# Altium PCB MCU1.PcbDoc
Units mm, origin at the board's own origin, x right, y up, seen from the top; angles counter-clockwise.
Board outline 58 x 31.5 mm, 2 copper layers (Top Layer, Bottom Layer); 38 components, 60 nets, 160 pads, 36 vias.
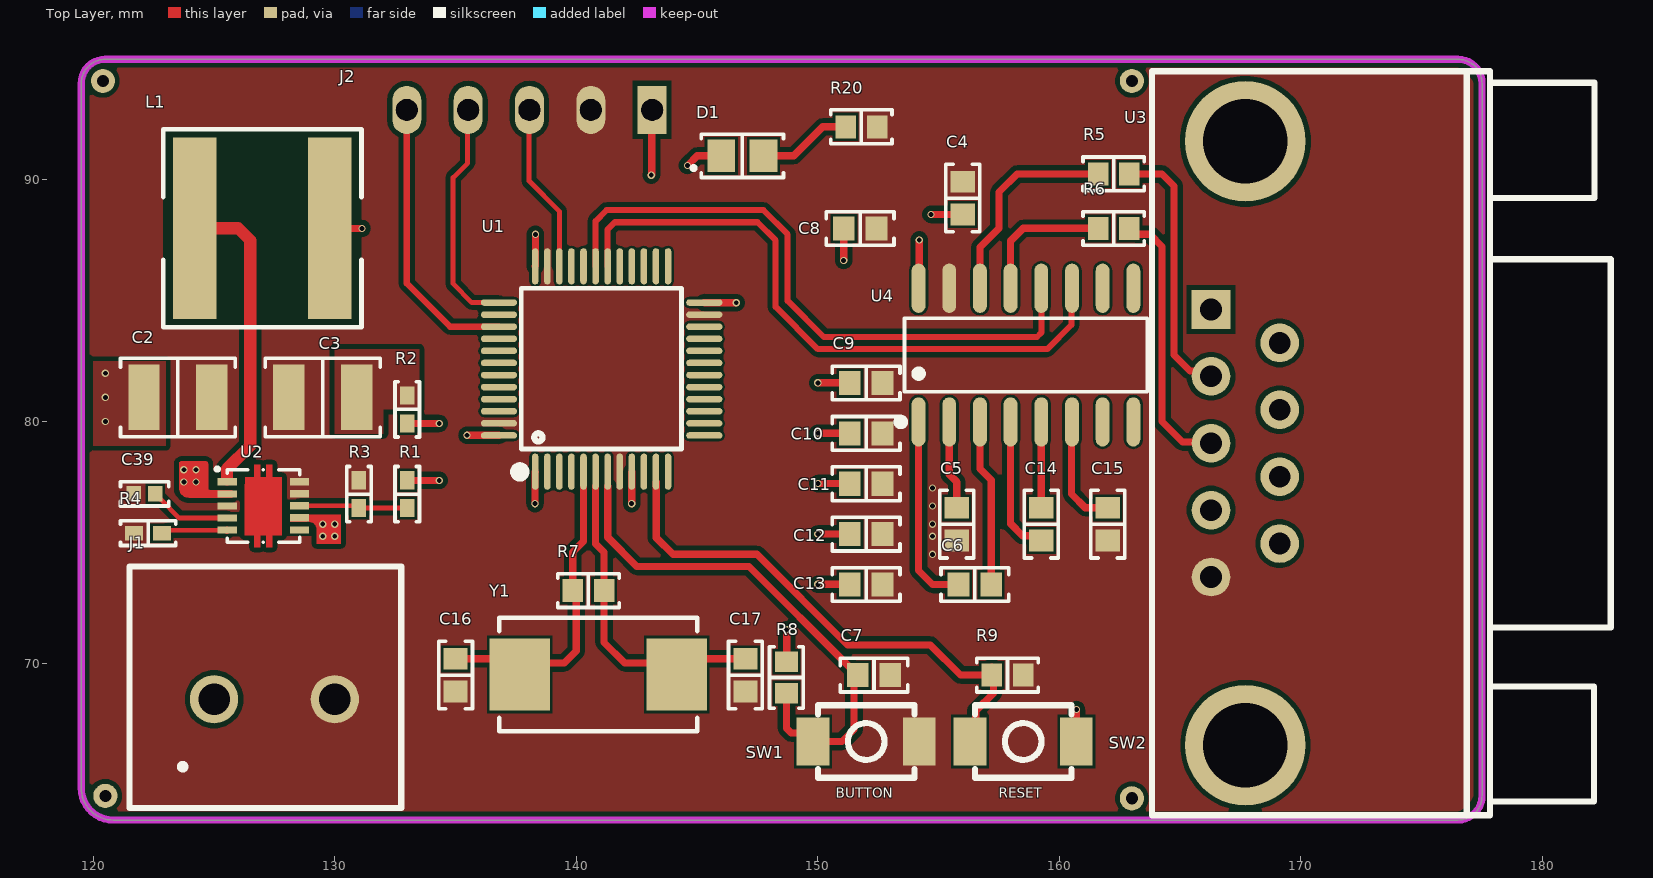
[diagram p0: Top Layer view]
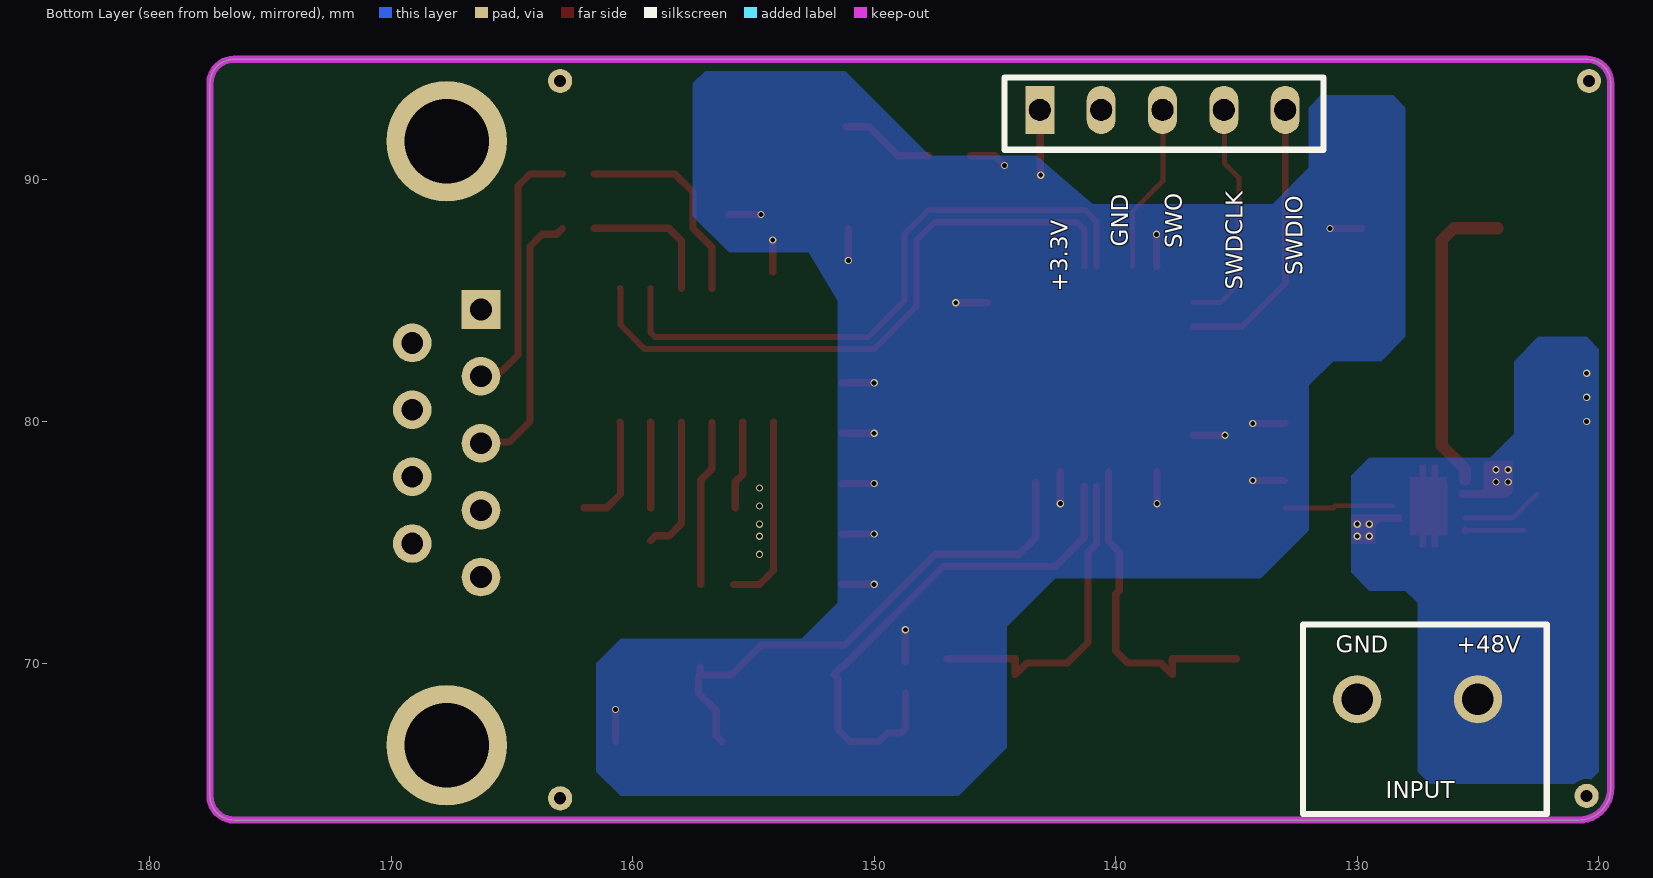
[diagram p1: Bottom Layer view, seen from below]

## Layer stack, top to bottom
Top Solder: solder mask 0.0102, Solder Resist, Dk 3.5
Top Layer: signal copper 0.0356
Dielectric 1: dielectric 0.32, FR-4, Dk 4.8
Bottom Layer: signal copper 0.0356
Bottom Solder: solder mask 0.0102, Solder Resist, Dk 3.5

## Board outline
119.5,64.821 119.5,65 119.5,94 cw(c120.5,94) 120.5,95 120.821,95 176.5,95 cw(c176.5,94) 177.5,94 177.5,93.5 177.5,64.5 cw(c176.5,64.5) 176.5,63.5 120.821,63.5 cw(c120.821,64.821)

## Design rules (kind name [scope] priority, off if disabled: settings)
Clearance [All] p1: gap=0.2 ignorepadtopadclearanceinfootprint=FALSE except(0.1: SMDPad-SMDPad SMDPad-Fill SMDPad-Poly SMDPad-Region)
HoleSize [All] p1: absolutevalues=TRUE maxlimit=6.3 minlimit=0.3 maxpercent=80.000 minpercent=20.000
PlaneClearance [All] p1: clearance=0
PlaneConnect [All] p1: planeconnectstyle=Direct reliefexpansion=0.508 reliefentries=4 reliefconductorwidth=0.254 reliefairgap=0.254
PolygonConnect [All] p1: connectstyle=Direct reliefconductorwidth=0.254 reliefentries=4 polygonreliefangle="90 Angle" airgapwidth=0.254
RoutingVias [All] p1: holewidth=1.5 width=3 viastyle="Through Hole" minholewidth=0.2 minwidth=0.3 maxholewidth=6.3 maxwidth=6
SolderMaskExpansion [All] p1: expansion=0.102 istentingtop=FALSE
Width [All] p1: maxlimit=3 minlimit=0.2 preferedwidth=0.5 minimp=50.000000 maximp=50.000000 favimp=50.000000
27 further rules are at their usual default settings.

## Components (designator, comment, footprint, x,y, rotation, side; value= is the part's Value field where it differs from the comment)
C2 "2.2 µF" "CAP 1210_3225 - 1MM" 123.5,81 r180 top
C3 "47 µF" "CAP 1210_3225 - 1MM" 129.5,81 r0 top
C4 "0.1 µF" "CAP 0603_1608" 156,89.25 r270 top
C5 "0.1µF" "CAP 0603_1608" 155.75,75.75 r90 top
C6 "0.1µF" "CAP 0603_1608" 156.5,73.25 r180 top
C7 "0.1 µF" "CAP 0603_1608" 152.325,69.5 r180 top
C8 "0.1 µF" "CAP 0603_1608" 151.75,87.991 r180 top
C9 "0.1 µF" "CAP 0603_1608" 152,81.593 r180 top
C10 "0.1 µF" "CAP 0603_1608" 152,79.507 r180 top
C11 "0.1 µF" "CAP 0603_1608" 152,77.421 r180 top
C12 "0.1 µF" "CAP 0603_1608" 152,75.336 r180 top
C13 "4.7µF" "CAP 0603_1608" 152,73.25 r180 top
C14 "0.1µF" "CAP 0603_1608" 159.25,75.75 r270 top
C15 "0.1µF" "CAP 0603_1608" 162,75.75 r90 top
C16 "22pF" "CAP 0603_1608" 135,69.5 r90 top
C17 "22pF" "CAP 0603_1608" 147,69.5 r90 top
C39 "0.047 µF" "CAP 0402_1005" 122.125,77 r0 top
D1 "LED_GREEN" LED_GREEN 146,91 r0 top
J1 "Power Klemens" PCBComponent_1 125,68.5 r0 top
J2 "HEADER 1X5" 1X5-PIN-HEADER-2.54MM_ES 138.06,92.9 r180 top
L1 "47 µH" "TAIYO YUDEN NRS8030" 127,88 r0 top
R1 "169 kOhms" "RES 0402_1005" 133,76.995 r90 top
R2 "200 mOhms" "RES 0402_1005" 133,80.5 r270 top
R3 "100 kOhms" "RES 0402_1005" 131,76.995 r270 top
R4 "100 kOhms" "RES 0402_1005" 122.268,75.375 r0 top
R5 "330 Ohms" "RES 0603_1608" 162.25,90.25 r0 top
R6 "330 Ohms" "RES 0603_1608" 162.25,87.991 r0 top
R7 "1 MOhms" "RES 0603_1608" 140.5,73 r180 top
R8 "10 kOhms" "RES 0603_1608" 148.7,69.4 r90 top
R9 "10 kOhms" "RES 0603_1608" 157.85,69.5 r180 top
R20 "220 Ohms" "RES 0603_1608" 151.8,92.2 r180 top
SW1 "Swıtch" SW-SMD_L4.0-W3.0-LS5.0 152,66.75 r0 top
SW2 "Swıtch" SW-SMD_L4.0-W3.0-LS5.0 158.5,66.75 r180 top
U1 "STM32F103C8T6" UFQFPN-48_STM32 141,82 r0 top
U2 "LM5166" VSON-10_L3.0-W3.0-P0.50-TL-EP-1 127,76.5 r0 top
U3 "DB9_FEMALE" DB9-TH_DB9F_C5164093 173.476,79.1 r90 top
U4 "MAX3232" SOP-16_L9.9-W3.9-P1.27-LS6.0-BL 158.5,82.75 r0 top
Y1 "8MHz" "NDK NX8045GB" 140.905,69.525 r180 top

## Footprints (in the part's own frame and the unit in brackets; to place one, negate y for a bottom-side part, rotate by r counter-clockwise, add the part's x,y. Pads: shape width x height; smd on the part's side, far side on the other; paste and mask are expansions set on the pad)
1X5-PIN-HEADER-2.54MM_ES [mm]
  rect 1.2x2 hole 0.9 slot 0.9 at 90 deg paste+0 mask+0.102: 1(-5.08,0)
  oval 1.2x2 hole 0.9 slot 0.9 at 90 deg paste+0 mask+0.102: 2(-2.54,0) 3(0,0) 4(2.54,0) 5(5.08,0)
"CAP 0402_1005" [mm] "Chip Capacitor, 2-Leads, Body 1.02x0.51mm, IPC Medium Density"
  rect 0.6x0.64 smd: 1(-0.44,0) 2(0.44,0)
  silkscreen extent -1,-0.5 1,0.5, body extent -0.5,-0.26 0.5,0.26, height 0.52
"CAP 0603_1608" [mm] "Chip Capacitor, 2-Leads, Body 1.60x0.80mm, IPC Medium Density"
  rect 0.9x1 smd: 1(-0.675,0) 2(0.675,0)
  silkscreen extent -1.4,-0.7 1.4,0.7, body extent -0.8,-0.41 0.8,0.41, height 0.82
"CAP 1210_3225 - 1MM" [mm] "Chip Capacitor, 2-Leads, Body 3.20x2.50mm, IPC Medium Density"
  rect 1.3x2.7 smd: 1(-1.4,0) 2(1.4,0)
  silkscreen extent -2.37,-1.63 2.37,1.63, body extent -1.6,-1.25 1.6,1.25, height 1
DB9-TH_DB9F_C5164093 [mm]
  rect 1.6x1.6 hole 0.9 paste+0 mask+0.051: 1(5.54,7.195)
  round 1.6 hole 0.9 paste+0 mask+0.051: 2(2.77,7.195) 3(0,7.195) 4(-2.77,7.195) 5(-5.54,7.195) 6(4.155,4.355) 7(1.385,4.355) 8(-1.385,4.355) 9(-4.155,4.355)
  round 5 hole 3.5 paste+0 mask+0.051: 10(-12.5,5.776) 11(12.5,5.776)
  silkscreen extent -15.4,-9.35 15.4,9.65, body extent -15.41,-9.75 15.41,9.45, height 13.25
LED_GREEN [mm]
  rect 1.15x1.35 smd: 1(0,0) 2(1.75,0)
  silkscreen extent -1.18,-0.9 2.57,0.9, body extent -0.13,-0.63 1.88,0.63, height 0.8
"NDK NX8045GB" [mm] "Crystal, 2-Leads, Body 4.50x8.00mm, Pitch 6.50mm, IPC Medium Density"
  rect 2.5x3 smd: 1(-3.25,0) 2(3.25,0)
  silkscreen extent -4.1,-2.35 4.1,2.35, body extent -4,-2.25 4,2.25, height 1.8
PCBComponent_1 [mm]
  round 2 hole 1.3: 1(0,0) 2(5,0)
  silkscreen extent -3.5,-4.5 7.75,5.5, body extent -3.4,-4.5 7.5,5.3, height 14.2
"RES 0402_1005" [mm] "Chip Resistor, 2-Leads, Body 1.0x0.5mm, IPC Medium Density"
  rect 0.75x0.6 smd: 1(-0.575,0) 2(0.575,0)
  silkscreen extent -1.14,-0.51 1.14,0.51, body extent -0.5,-0.25 0.5,0.25, height 0.35
"RES 0603_1608" [mm] "Chip Resistor, 2-Leads, Body 1.60x0.80mm, IPC Medium Density"
  rect 0.85x0.95 smd: 1(-0.65,0) 2(0.65,0)
  silkscreen extent -1.27,-0.7 1.27,0.7, body extent -0.8,-0.4 0.8,0.4, height 0.45
SOP-16_L9.9-W3.9-P1.27-LS6.0-BL [mm]
  oval 0.574x2.038 smd paste+0 mask+0.051: 1(-4.329,-2.769) 2(-3.059,-2.769) 3(-1.789,-2.769) 4(-0.519,-2.769) 5(0.751,-2.769) 6(2.021,-2.769) 7(3.291,-2.769) 8(4.561,-2.769) 9(4.561,2.769) 10(3.291,2.769) 11(2.021,2.769) 12(0.751,2.769) 13(-0.519,2.769) 14(-1.789,2.769) 15(-3.059,2.769) 16(-4.329,2.769)
  silkscreen extent -5.22,-2.92 5.14,1.52, body extent -4.89,-3.02 5.09,3.22, height 1.58
SW-SMD_L4.0-W3.0-LS5.0 [mm]
  rect 1.35x2 smd paste+0 mask+0.051: 1(-2.2,0) 2(2.2,0)
  silkscreen extent -2,-1.5 2,1.5, body extent -2.32,-1.65 2.58,1.25
"TAIYO YUDEN NRS8030" [mm] "Precision Wire Wound Inductor, 2-Leads, Body 8.00x8.00mm, IPC Medium Density"
  rect 1.8x7.5 smd: 1(-2.8,0) 2(2.8,0)
  silkscreen extent -4.1,-4.1 4.1,4.1, body extent -4,-4 4,4, height 3
UFQFPN-48_STM32 [mm]
  oval 0.27x1.5 smd paste+0 mask+0.05: 1(-2.703,-4.076) 2(-2.203,-4.076) 3(-1.703,-4.076) 4(-1.203,-4.076) 5(-0.703,-4.076) 6(-0.203,-4.076) 7(0.297,-4.076) 8(0.797,-4.076) 9(1.297,-4.076) 10(1.797,-4.076) 11(2.297,-4.076) 12(2.797,-4.076) 25(2.797,4.424) 26(2.297,4.424) 27(1.797,4.424) 28(1.297,4.424) 29(0.797,4.424) 30(0.297,4.424) 31(-0.203,4.424) 32(-0.703,4.424) 33(-1.203,4.424) 34(-1.703,4.424) 35(-2.203,4.424) 36(-2.703,4.424)
  oval 1.5x0.27 smd paste+0 mask+0.05: 13(4.297,-2.576) 14(4.297,-2.076) 15(4.297,-1.576) 16(4.297,-1.076) 17(4.297,-0.576) 18(4.297,-0.076) 19(4.297,0.424) 20(4.297,0.924) 21(4.297,1.424) 22(4.297,1.924) 23(4.297,2.424) 24(4.297,2.924) 37(-4.203,2.924) 38(-4.203,2.424) 39(-4.203,1.924) 40(-4.203,1.424) 41(-4.203,0.924) 42(-4.203,0.424) 43(-4.203,-0.076) 44(-4.203,-0.576) 45(-4.203,-1.076) 46(-4.203,-1.576) 47(-4.203,-2.076) 48(-4.203,-2.576)
  silkscreen extent -3.54,-4.29 3.35,3.51, body extent -4.5,-4.37 4.5,4.63, height 1.4
VSON-10_L3.0-W3.0-P0.50-TL-EP-1 [mm]
  rect 0.8x0.3 smd paste+0 mask+0.051: 1(-1.46,1.002) 2(-1.46,0.502) 3(-1.46,0.002) 4(-1.46,-0.498) 5(-1.46,-0.997) 6(1.54,-0.99) 7(1.54,-0.49) 8(1.54,0.01) 9(1.54,0.51) 10(1.54,1.01)
  Top Layer region: -0.719,1.197 -0.334,1.197 -0.334,1.713 -0.084,1.713 -0.084,1.197 0.166,1.197 0.166,1.713 0.416,1.713 0.416,1.197 0.801,1.197 0.801,-1.203 0.416,-1.203 0.416,-1.708 0.166,-1.708 0.166,-1.203 -0.084,-1.203 -0.084,-1.708 -0.334,-1.708 -0.334,-1.203 -0.719,-1.203 -0.719,0.892 -0.719,0.893 -0.719,0.893 -0.719,0.893
  silkscreen extent -1.94,-1.5 1.54,1.61, body extent -1.46,-1.56 1.66,1.56, height 1

## Part data
C2: library part 1210BB225K101NGX085T, "CAP CER 2.2UF 100V X7R 1210", Device Package="1210 (3225 Metric)", manufacturer="Knowles Novacap", Operating Temperature="-55°C ~ 125°C", Supplier Part Number 1=1763-1136-1-ND, Temperature Coefficient=X7R, Tolerance=±10%, Voltage - Rated=100V, Applications="General Purpose", Capacitance="2.2 µF", componentlink1description=Datasheet, componentlink1url=https://www.knowlescapacitors.com/getattachment/6c8d48ef-fc2b-4752-ae2c-ce6c208de0c4/High-Capacitance-Chip.aspx, componentlink2description="DigiKey Link", componentlink2url=https://www.digikey.com/en/products/detail/knowles-novacap/1210BB225K101NGX085T/7304028, Features="Gold Flash Termination", lastupdated="9.02.2024 20:44:47", Lifecycle Status=Active, Minimum Order=1, Mounting Type="Surface Mount, MLCC", Package / Case="1210 (3225 Metric)", packaging=TapeAndReel, Part Number=1210BB225K101NGX085T, Part Status=Active, partid=24765, price=3.04, series=-, Size / Dimension="0.125\" L x 0.100\" W (3.18mm x 2.54mm)", Supplier 1=DigiKey, Thickness (Max)="0.065\" (1.65mm)"
C3: library part 885012109007, "CAP CER 47UF 10V X5R 1210", Device Package="1210 (3225 Metric)", manufacturer="Würth Elektronik", Operating Temperature="-55°C ~ 85°C", Supplier Part Number 1=732-7378-1-ND, Temperature Coefficient=X5R, Tolerance=±20%, Voltage - Rated=10V, Applications="General Purpose", Capacitance="47 µF", componentlink1description=Datasheet, componentlink1url=https://katalog.we-online.de/pbs/datasheet/885012109007.pdf, componentlink2description="DigiKey Link", componentlink2url=https://www.digikey.com/en/products/detail/würth-elektronik/885012109007/5453233, lastupdated="9.02.2024 20:44:53", Lifecycle Status=Active, Minimum Order=1, Mounting Type="Surface Mount, MLCC", Package / Case="1210 (3225 Metric)", packaging=TapeAndReel, Part Number=885012109007, Part Status=Active, partid=44953, price=0.47, series=WCAP-CSGP, Size / Dimension="0.126\" L x 0.098\" W (3.20mm x 2.50mm)", Supplier 1=DigiKey, Thickness (Max)="0.110\" (2.80mm)"
C4: library part 6R3X14W104MV4T, "CAP CER 0.1UF 6.3V X7R 0603", Device Package="0603 (1608 Metric)", manufacturer="Johanson Dielectrics Inc.", Operating Temperature="-55°C ~ 125°C", Supplier Part Number 1=709-1009-1-ND, Temperature Coefficient=X7R, Tolerance=±20%, Voltage - Rated=6.3V, Applications="Bypass, Decoupling", Capacitance="0.1 µF", componentlink1description=Datasheet, componentlink1url=https://www.johansondielectrics.com/downloads/x2y-filter-and-decoupling-capacitors.pdf, componentlink2description="DigiKey Link", componentlink2url=https://www.digikey.com/en/products/detail/johanson-dielectrics-inc/6R3X14W104MV4T/1556331, Features="Low ESL (X2Y)", lastupdated="9.02.2024 20:10:30", Lifecycle Status=Active, Minimum Order=1, Mounting Type="Surface Mount, MLCC", Package / Case="0603 (1608 Metric)", packaging=TapeAndReel, Part Number=6R3X14W104MV4T, Part Status=Active, partid=2650, price=0.08, series=X2Y®, Size / Dimension="0.064\" L x 0.035\" W (1.63mm x 0.89mm)", Supplier 1=DigiKey, Thickness (Max)="0.026\" (0.66mm)"
C5 C6 C14 C15: library part 0603YC104MAT2A, "CAP CER 0.1UF 16V X7R 0603", Device Package="0603 (1608 Metric)", manufacturer="AVX Corporation", Operating Temperature="-55°C ~ 125°C", Supplier Part Number 1=478-3727-1-ND, Temperature Coefficient=X7R, Tolerance=±20%, Voltage - Rated=16V, Applications="General Purpose", Capacitance=0.1µF, componentlink1description=Datasheet, componentlink1url=http://datasheets.avx.com/X7RDielectric.pdf, componentlink2description="DigiKey Link", componentlink2url=http://digikey.com/product-detail/en/avx-corporation/0603YC104MAT2A/478-3727-1-ND/1116425, lastupdated="2.09.2020 01:03:32", Lifecycle Status=Active, Minimum Order=1, Mounting Type="Surface Mount, MLCC", Package / Case="0603 (1608 Metric)", packaging=TapeAndReel, Part Number=0603YC104MAT2A, Part Status=Active, partid=4371, price=0.01, series=-, Size / Dimension="0.063\" L x 0.032\" W (1.60mm x 0.81mm)", Supplier 1=DigiKey, Thickness (Max)="0.035\" (0.90mm)"
C7 C8 C9 C10 C11 C12: library part 6R3X14W104MV4T, "CAP CER 0.1UF 6.3V X7R 0603", Part Number=6R3X14W104MV4T
C13: library part 06036D475KAT4A, "CAP CER 4.7UF 6.3V X5R 0603", Part Number=06036D475KAT4A
C16 C17: library part 06036A220J4T2A, "CAP CER 22PF 6.3V NP0 0603", Part Number=06036A220J4T2A
C39: library part C0402C473K3REC7867, "CAP CER 0402 47NF 16V X7R 10%", Device Package="0402 (1005 Metric)", manufacturer=KEMET, Operating Temperature="-55°C ~ 125°C", Supplier Part Number 1=399-C0402C473K3REC7867CT-ND, Temperature Coefficient=X7R, Tolerance=±10%, Voltage - Rated=25V, Applications="ESD Protection", Capacitance="0.047 µF", componentlink1description=Datasheet, componentlink1url=https://api.kemet.com/component-edge/download/datasheet/C0402C473K3REC7867.pdf, componentlink2description="DigiKey Link", componentlink2url=https://www.digikey.com/en/products/detail/kemet/C0402C473K3REC7867/8643594, lastupdated="9.02.2024 20:04:15", Lifecycle Status=Active, Minimum Order=1, Mounting Type="Surface Mount, MLCC", Package / Case="0402 (1005 Metric)", packaging=TapeAndReel, Part Number=C0402C473K3REC7867, Part Status=Active, partid=33555, price=0.01, series="ESD SMD Comm X7R", Size / Dimension="0.039\" L x 0.020\" W (1.00mm x 0.50mm)", Supplier 1=DigiKey, Thickness (Max)="0.022\" (0.55mm)"
J2: library part "HEADER 1X5 COPY"
L1: library part NRS8030T470MJGJ, "FIXED IND 47UH 1.3A 221 MOHM SMD", Current - Saturation=1.1A, Current Rating (Amps)="1.3 A", DC Resistance (DCR)="221mOhm Max", Device Package=Nonstandard, Frequency - Self Resonant=11MHz, manufacturer="Taiyo Yuden", Operating Temperature="-25°C ~ 125°C", Supplier Part Number 1=587-2968-1-ND, Tolerance=±20%, Inductance Frequency - Test="100 kHz", componentlink1description=Datasheet, componentlink1url=https://www.yuden.co.jp/productdata/catalog/wound04_e.pdf, componentlink2description="DigiKey Link", componentlink2url=https://www.digikey.com/en/products/detail/taiyo-yuden/NRS8030T470MJGJ/2666006, Height - Seated (Max)="0.118\" (3.00mm)", lastupdated="8.02.2024 21:55:48", Lifecycle Status=Active, Material - Core=Ferrite, Minimum Order=1, Mounting Type="Surface Mount", Package / Case=Nonstandard, packaging=TapeAndReel, Part Number=NRS8030T470MJGJ, Part Status=Active, partid=5487, price=0.16, series="NR, S Type", Shielding=Shielded, Size / Dimension="0.315\" L x 0.315\" W (8.00mm x 8.00mm)", Supplier 1=DigiKey, Type="Drum Core, Wirewound", Inductance="47 µH"
R1: library part RC0402FR-07169KL, "RES 169K OHM 1% 1/16W 0402", Device Package="0402 (1005 Metric)", manufacturer=Yageo, Operating Temperature="-55°C ~ 155°C", Power (Watts)="0.063W, 1/16W", Supplier Device Package=0402, Supplier Part Number 1=YAG3000CT-ND, Temperature Coefficient=±100ppm/°C, Tolerance=±1%, componentlink1description=Datasheet, componentlink1url=https://www.yageo.com/upload/media/product/productsearch/datasheet/rchip/PYu-RC_Group_51_RoHS_L_10.pdf, componentlink2description="DigiKey Link", componentlink2url=https://www.digikey.com/en/products/detail/yageo/RC0402FR-07169KL/5280860, Composition="Thick Film", Features="Moisture Resistant", Height - Seated (Max)="0.016\" (0.40mm)", lastupdated="9.02.2024 20:30:22", Lifecycle Status=Active, Minimum Order=1, Number of Terminations=2, Package / Case="0402 (1005 Metric)", packaging=CutTape, Part Number=RC0402FR-07169KL, Part Status=Active, partid=2821, price=0.01, Resistance="169 kOhms", series=RC_L, Size / Dimension="0.039\" L x 0.020\" W (1.00mm x 0.50mm)", Supplier 1=DigiKey
R2: library part MFL0402R2000FP, "RES 0.2 OHM 1% 1/16W 0402", Device Package="0402 (1005 Metric)", manufacturer="Eaton - Electronics Division", Operating Temperature="-55°C ~ 155°C", Power (Watts)="0.063W, 1/16W", Supplier Device Package=0402, Supplier Part Number 1=283-MFL0402R2000FPCT-ND, Temperature Coefficient=±300ppm/°C, Tolerance=±1%, componentlink1description=Datasheet, componentlink1url=https://www.eaton.com/content/dam/eaton/products/electronic-components/resources/data-sheet/eaton-mfl-smd-current-sense-resistor-metal-film-data-sheet-elx1181.pdf, componentlink2description="DigiKey Link", componentlink2url=https://www.digikey.com/en/products/detail/eaton-electronics-division/MFL0402R2000FP/16713385, Composition="Metal Film", Features="Current Sense, Moisture Resistant", Height - Seated (Max)="0.016\" (0.40mm)", lastupdated="9.02.2024 20:28:43", Lifecycle Status=Active, Minimum Order=1, Number of Terminations=2, Package / Case="0402 (1005 Metric)", packaging=TapeAndReel, Part Number=MFL0402R2000FP, Part Status=Active, partid=70238, price=0.03, Resistance="200 mOhms", series=MFL, Size / Dimension="0.039\" L x 0.020\" W (1.00mm x 0.50mm)", Supplier 1=DigiKey
R3 R4: library part AC0402JR-07100KL, "RES SMD 100K OHM 5% 1/16W 0402", Device Package="0402 (1005 Metric)", manufacturer=Yageo, Operating Temperature="-55°C ~ 155°C", Power (Watts)="0.063W, 1/16W", Ratings=AEC-Q200, Supplier Device Package=0402, Supplier Part Number 1=YAG3515CT-ND, Temperature Coefficient=±100ppm/°C, Tolerance=±5%, componentlink1description=Datasheet, componentlink1url=https://www.yageo.com/upload/media/product/productsearch/datasheet/rchip/PYu-AC_51_RoHS_L_7.pdf, componentlink2description="DigiKey Link", componentlink2url=https://www.digikey.com/en/products/detail/yageo/AC0402JR-07100KL/5895569, Composition="Thick Film", Features="Automotive AEC-Q200, Moisture Resistant", Height - Seated (Max)="0.015\" (0.37mm)", lastupdated="9.02.2024 20:30:20", Lifecycle Status=Active, Minimum Order=1, Number of Terminations=2, Package / Case="0402 (1005 Metric)", packaging=CutTape, Part Number=AC0402JR-07100KL, Part Status=Active, partid=3380, price=0.01, Resistance="100 kOhms", series=AC, Size / Dimension="0.039\" L x 0.020\" W (1.00mm x 0.50mm)", Supplier 1=DigiKey
R5 R6: library part CRGH0603F330R, "RES SMD 330 OHM 1% 1/5W 0603", Device Package="0603 (1608 Metric)", manufacturer="TE Connectivity Passive Product", Operating Temperature="-55°C ~ 155°C", Power (Watts)="0.2W, 1/5W", Supplier Device Package=0603, Supplier Part Number 1=A129541CT-ND, Temperature Coefficient=±100ppm/°C, Tolerance=±1%, componentlink1description=Datasheet, componentlink1url=https://www.te.com/commerce/DocumentDelivery/DDEController?Action=srchrtrv&DocNm=1773204-1&DocType=DS&DocLang=English, componentlink2description="DigiKey Link", componentlink2url=https://www.digikey.com/en/products/detail/te-connectivity-passive-product/CRGH0603F330R/5586961, Composition="Thick Film", Height - Seated (Max)="0.022\" (0.55mm)", lastupdated="9.02.2024 20:43:33", Lifecycle Status=Active, Minimum Order=1, Number of Terminations=2, Package / Case="0603 (1608 Metric)", packaging=TapeAndReel, Part Number=CRGH0603F330R, Part Status=Active, partid=5733, price=0.01, Resistance="330 Ohms", series="CRGH, Neohm", Size / Dimension="0.063\" L x 0.031\" W (1.60mm x 0.80mm)", Supplier 1=DigiKey
R7: library part RT0603FRE071ML, "RES SMD 1M OHM 1% 1/10W 0603", Part Number=RT0603FRE071ML
R8: library part RNCS0603BKE10K0, "RES 10K OHM 0.1% 1/16W 0603", Device Package="0603 (1608 Metric)", manufacturer="Stackpole Electronics Inc", Operating Temperature="-55°C ~ 155°C", Power (Watts)="0.063W, 1/16W", Ratings=AEC-Q200, Supplier Device Package=0603, Supplier Part Number 1=RNCS0603BKE10K0CT-ND, Temperature Coefficient=±25ppm/°C, Tolerance=±0.1%, componentlink1description=Datasheet, componentlink1url=https://www.seielect.com/catalog/sei-rncs_rnch.pdf, componentlink2description="DigiKey Link", componentlink2url=https://www.digikey.com/en/products/detail/stackpole-electronics-inc/RNCS0603BKE10K0/1708836, Composition="Thin Film", Features="Anti-Corrosive, Automotive AEC-Q200, Moisture Resistant", Height - Seated (Max)="0.022\" (0.55mm)", lastupdated="9.02.2024 20:43:37", Lifecycle Status=Active, Minimum Order=1, Number of Terminations=2, Package / Case="0603 (1608 Metric)", packaging=TapeAndReel, Part Number=RNCS0603BKE10K0, Part Status=Active, partid=4838, price=0.06, Resistance="10 kOhms", series=RNCS, Size / Dimension="0.061\" L x 0.031\" W (1.55mm x 0.80mm)", Supplier 1=DigiKey
R9: library part CPF0603B10KE, "RES SMD 10K OHM 0.1% 1/16W 0603", Part Number=CPF0603B10KE
R20: library part CRCW0603220RJNEAHP, "RES SMD 220 OHM 5% 1/3W 0603", Device Package="0603 (1608 Metric)", manufacturer="Vishay Dale", Operating Temperature="-55°C ~ 155°C", Power (Watts)="0.333W, 1/3W", Ratings=AEC-Q200, Supplier Device Package=0603, Supplier Part Number 1=541-220SACT-ND, Temperature Coefficient=±200ppm/°C, Tolerance=±5%, componentlink1description=Datasheet, componentlink1url=http://www.vishay.com/docs/20043/crcwhpe3.pdf, componentlink2description="DigiKey Link", componentlink2url=https://www.digikey.com/en/products/detail/vishay-dale/CRCW0603220RJNEAHP/2222292, Composition="Thick Film", Features="Automotive AEC-Q200, Pulse Withstanding", Height - Seated (Max)="0.022\" (0.55mm)", lastupdated="9.02.2024 20:43:28", Lifecycle Status=Active, Minimum Order=1, Number of Terminations=2, Package / Case="0603 (1608 Metric)", packaging=TapeAndReel, Part Number=CRCW0603220RJNEAHP, Part Status=Active, partid=6998, price=0.01, Resistance="220 Ohms", series=CRCW-HP, Size / Dimension="0.063\" L x 0.033\" W (1.60mm x 0.85mm)", Supplier 1=DigiKey
U2: library part LM5166DRCR
U3: library part 5745781-4
U4: library part MAX3232ESE-MS
Y1: library part NX8045GB-8.000M-STD-CSF-4, "CRYSTAL 8.0000MHZ 8PF SMD", ESR (Equivalent Series Resistance)="200 Ohms", Frequency Stability=±30ppm, Frequency Tolerance=±20ppm, Load Capacitance=8pF, manufacturer="NDK America, Inc.", Operating Mode=Fundamental, Operating Temperature="-10°C ~ 70°C", Package / Case="2-SMD, No Lead", Supplier Part Number 1=644-1279-1-ND, componentlink1description=Datasheet, componentlink1url=http://www.ndk.com/images/products/catalog/c_NX8045GB-STD-CSF-4_e.pdf, componentlink2description="DigiKey Link", componentlink2url=http://digikey.com/product-detail/en/ndk-america-inc/NX8045GB-8.000M-STD-CSF-4/644-1279-1-ND/5023011, Frequency=8MHz, Height - Seated (Max)="0.079\" (2.00mm)", lastupdated="8.02.2024 21:34:41", Lifecycle Status=Active, Minimum Order=1, Mounting Type="Surface Mount", packaging=TapeAndReel, Part Number=NX8045GB-8.000M-STD-CSF-4, Part Status=Active, partid=639, price=0.40, series=NX8045GB, Size / Dimension="0.315\" L x 0.177\" W (8.00mm x 4.50mm)", Supplier 1=DigiKey, Type="MHz Crystal"

## Free pads (board coordinates)
  round 1 hole 0.5: ""(120.4,94.1) ""(120.5,64.5) ""(163,64.4) ""(163,94.1)

## Via types
v1: diameter 0.3, hole 0.2, Top Layer to Bottom Layer, tented both sides, 36 vias

## Nets (pads, with @x,y where several pads share a name; then routed paths per layer and width w, separated by ;. In a path a pad name is that pad's centre, name@x,y a point inside that pad or via, vN(x,y) a via of type N, cw(c..) or ccw(c..) an arc to the next point about the centre after c; other vN are vias at no path point)
GND: C2.1 C3.1 C4.1 C5.1 C7.1 C8.1 C9.1 C10.1 C11.1 C12.1 C13.1 C15.1 C16.1 C17.1 C39.1 J1.2 J2.2 R3.1 R4.1 R9.1 R20.1 SW1.2 U1.8 U1.23 U1.35 U1.47 U2.3 U2.9 U2.10 U3.5 U4.15
  other v1: 154.75,74.5 154.75,75.25 154.75,75.75 154.75,76.5 154.75,77.25
NetC1_2: 
NetC2_2: C2.2 J1.1 U2.2 U2.7 | length 0.1
  Top Layer w0.2: U2.2@125.49,77.052 U2.2 ; U2.7 U2.7@128.59,75.96
  other v1: 129.5,75.25 130,75.25 129.5,75.75 130,75.75 123.75,77.5 124.25,77.5 123.75,78 124.25,78 120.5,80 120.5,81 120.5,82
NetC3_2: C3.2 R2.1
NetC4_2: C4.2 C8.2 C9.2 C10.2 C11.2 C12.2 C13.2 D1.1 J2.1 L1.2 R1.2 R2.2 R8.2 SW2.1 U1.1 U1.9 U1.24 U1.36 U1.48 U4.16 | length 27.9
  Top Layer w0.3: L1.2 129.807,87.993 v1(131.125,87.993) ; R2.2 133.007,79.918 v1(134.325,79.918) ; R1.2@133.007,77.562 v1(134.325,77.562) ; v1(135.472,79.431) 136.79,79.431 U1.48 ; v1(138.29,76.599) 138.29,77.917 U1.1 ; U1.36 138.304,86.431 v1(138.304,87.749) ; v1(142.29,76.599) 142.29,77.917 U1.9 ; v1(143.1,90.2) 143.12,90.22 J2.1@143.12,92.7 ; v1(144.6,90.6) 145.007,91.007 145.993,91.007 D1.1 ; U1.24 145.304,84.917 v1(146.622,84.917) ; R8.2@148.707,70.057 v1(148.707,71.375) ; v1(150,73.257) 151.318,73.257 C13.2 ; v1(150,75.343) 151.318,75.343 C12.2 ; v1(150,77.429) 151.318,77.429 C11.2 ; v1(150,79.514) 151.318,79.514 C10.2 ; v1(150,81.6) 151.318,81.6 C9.2 ; v1(151.068,86.666) 151.068,87.984 C8.2 ; U4.16@154.2,86.2 v1(154.2,87.518) ; v1(154.682,88.575) C4.2 ; SW2.1 160.707,66.757 v1(160.707,68.075)
NetC5_2: C5.2 U4.2 | length 3.7
  Top Layer w0.3: U4.2 155.441,77.809 155.75,77.5 C5.2
NetC6_1: C6.1 U4.3 | length 6.9
  Top Layer w0.3: U4.3 156.711,78.039 157.175,77.575 C6.1
NetC6_2: C6.2 U4.1 | length 8
  Top Layer w0.3: U4.1 154.171,73.829 154.75,73.25 C6.2
NetC7_2: C7.2 R8.1 SW1.1 U1.7 | length 21.9
  Top Layer w0.3: U1.7@141.297,77.324 141.297,75.203 142.5,74 147.15,74 151.3,69.85 151.35,69.85 151.646,69.554 C7.2@151.646,69.504 ; R8.1 148.7,67.3 148.9,67.1 149.45,67.1 SW1.1 151,66.75 151.5,67.25 151.5,69.35 C7.2
NetC14_1: C14.1 U4.5 | length 3.6
  Top Layer w0.3: C14.1 C14.1 U4.5
NetC14_2: C14.2 U4.4 | length 5.8
  Top Layer w0.3: U4.4 157.981,75.769 158.476,75.274 159.051,75.274 C14.2
NetC15_2: C15.2 U4.6 | length 4.7
  Top Layer w0.3: U4.6 160.5,79.96 160.5,77 161.075,76.425 C15.2
NetC16_2: C16.2 R7.2 U1.5 Y1.2 | length 13.7
  Top Layer w0.3: C16.2 137.655,70.175 Y1.2 138.13,70 139.5,70 140,70.5 140,72.85 R7.2 139.85,74.6 140.297,75.047 U1.5
NetC17_2: C17.2 R7.1 U1.6 Y1.1 | length 13.7
  Top Layer w0.3: U1.6@140.797,77.324 140.797,74.94 141.15,74.588 R7.1 141.15,70.85 142,70 143.68,70 Y1.1 144.155,70.175 C17.2
NetC18_1: 
NetC18_2: 
NetC19_2: 
NetC22_2: 
NetC23_2: 
NetC25_2: 
NetC26_2: 
NetC32_2: 
NetC34_1: 
NetC34_2: 
NetC35_2: 
NetC36_1: 
NetC36_2: 
NetC37_2: 
NetC38_2: 
NetC39_2: C39.2 U2.4 | length 3.4
  Top Layer w0.2: C39.2 122.565,76.98 122.765,76.78 122.785,76.78 123.565,76 125.538,76 U2.4
NetD1_2: D1.2 R20.2 | length 3.9
  Top Layer w0.3: D1.2 149,91 150.2,92.2 R20.2
NetD2_2: 
NetJ2_3: J2.3 U1.34 | length 6.8
  Top Layer w0.2: J2.3@138.04,92.7 138.04,89.96 139.297,88.703 U1.34
NetJ2_4: J2.4 U1.37 | length 9.5
  Top Layer w0.2: J2.4@135.5,92.7 135.5,90.7 134.9,90.1 134.9,85.7 135.676,84.924 U1.37
NetJ2_5: J2.5 U1.39 | length 11.7
  Top Layer w0.254: J2.5 132.98,85.72 134.776,83.924 U1.39
NetJ3_3: 
NetJ3_4: 
NetJ3_5: 
NetL1_1: L1.1 U2.1 | length 12.8
  Top Layer w0.5: L1.1 126,88 126.5,87.5 126.5,79 125.54,78.04 U2.1@125.54,77.602
NetL3_1: 
NetR1_1: R1.1 R3.2 U2.8 | length 4.5
  Top Layer w0.2: U2.8 130.909,76.51 R3.2 R1.1
NetR4_2: R4.2 U2.5 | length 2.5
  Top Layer w0.2: R4.2@123.082,75.5 U2.5@125.538,75.5
  Top Layer w0.3: U2.5@125.538,75.5 U2.5
NetR5_1: R5.1 U4.14 | length 8.7
  Top Layer w0.3: U4.14 156.711,87.211 157.5,88 157.5,89.5 158.25,90.25 R5.1
NetR5_2: R5.2 U3.2 | length 11.3
  Top Layer w0.3: R5.2 164.25,90.25 164.75,89.75 164.75,82.75 165.41,82.09 166.495,82.09 U3.2@166.66,81.925
NetR6_1: R6.1 U4.13 | length 5.8
  Top Layer w0.3: U4.13 157.981,87.481 158.5,88 161.591,88 R6.1
NetR6_2: R6.2 U3.3 | length 11.7
  Top Layer w0.3: R6.2 163.141,87.75 163.75,87.75 164.25,87.25 164.25,80 165.095,79.155 U3.3@166.66,79.155
NetR9_2: R9.2 SW2.2 U1.11 | length 22.1
  Top Layer w0.3: U1.11@143.312,77.5 143.312,75.188 144,74.5 147.48,74.5 151.23,70.75 154.658,70.75 155.908,69.5 R9.2 ; SW2.2 156.541,66.991 156.541,68.024 157.268,68.751 157.268,69.432 R9.2 ; R9.2@157.2,69.832 R9.2
NetR10_1: 
NetR11_2: 
NetR13_1: 
NetR16_2: 
NetR18_1: 
NetR18_2: 
NetR19_1: 
NetR19_2: 
NetU1_30: U1.30 U4.11 | length 26.6
  Top Layer w0.25: U1.30 141.297,87.953 141.594,88.25 147.5,88.25 148.25,87.5 148.25,84.75 150,83 159.5,83 160.5,84 160.5,85.498 U4.11
NetU1_31: U1.31 U4.12 | length 26.2
  Top Layer w0.25: U1.31 140.797,88.297 141.25,88.75 147.75,88.75 148.75,87.75 148.75,85 150.25,83.5 159.074,83.5 159.25,83.676 159.25,85.518 U4.12
NetU5_30: 
NetU5_31: 
NetU5_40: 
pads on no net: U1.2 U1.3 U1.4 U1.10 U1.12 U1.13 U1.14 U1.15 U1.16 U1.17 U1.18 U1.19 U1.20 U1.21 U1.22 U1.25 U1.26 U1.27 U1.28 U1.29 U1.32 U1.33 U1.38 U1.40 U1.41 U1.42 U1.43 U1.44 U1.45 U1.46 U2.6 U3.1 U3.4 U3.6 U3.7 U3.8 U3.9 U3.10 U3.11 U4.7 U4.8 U4.9 U4.10

## Polygon pours and split planes (outlines as drawn)
GND on Top Layer "NONET_L-01_P-001" (solid, pour order 23): 119.75,93.75 cw(c120.75,93.75) 120.75,94.75 176,94.75 cw(c176,93.5) 177.25,93.5 177.25,65 cw(c176,65) 176,63.75 120.5,63.75 cw(c120.5,64.5) 119.75,64.5
NetC3_2 on Top Layer "NONET_L-01_P-001" (solid, pour order 9): 130,79.5 132,79.5 132,80.5 133.5,80.5 133.5,83 130,83
NetC2_2 on Top Layer "NONET_L-01_P-001" (solid, pour order 4): 120,82.5 123,82.5 123,79 120,79
NetC2_2 on Bottom Layer "NONET_L-01_P-001" (solid, pour order 6): 127,65 127.5,65.5 127.5,72.5 128,73 129.5,73 130.25,73.75 130.25,77.75 129.5,78.5 124.5,78.5 123.5,79.5 123.5,82.5 122.5,83.5 120.5,83.5 120,83 120,66.5 120,65.5 120.5,65
NetC4_2 on Bottom Layer "NONET_L-01_P-001" (solid, pour order 8): 160.5,64.5 161.5,65.5 161.5,70 160.5,71 153,71 151.5,72.5 151.5,85 152.7,87 156,87 157.5,88.5 157.5,94 157,94.5 151.2,94.5 147.707,91.007 143.292,91.007 140.95,89 133.5,89 132,90.5 132,93 131.5,93.5 128.5,93.5 128,93 128,84.5 129,83.5 128,84.5 128,83.5 130,81.5 129,82.5 131,82.5 132,81.5 132,75.5 134,73.5 142.5,73.5 144.5,71.5 144.5,66.5 146.5,64.5

## Keep-outs
Keep-Out Layer:
  the board outline again, w0.3

## Other copper
Top Layer:
  pour cut-out: 122.9,92.1 122.9,83.9 131.1,83.9 131.1,92.1
  pour cut-out: 122.9,92.1 122.9,84 131.1,84 131.1,92.1
  pour cut-out: 122.9,92.1 131.1,92.1 131.1,83.9 122.9,83.9
  region net NetC2_2: 128.146,75.839 128.146,76.139 130.246,76.139 130.246,75.439 130.246,74.939 129.246,74.939 129.246,75.539 ccw(c128.946,75.539) 128.946,75.839 128.846,75.839
  region net NetC2_2: 125.75,76.85 125.75,77.15 124.85,77.15 cw(c124.85,77.25) 124.75,77.25 124.75,78.25 ccw(c124.65,78.25) 124.65,78.35 123.65,78.35 ccw(c123.65,78.25) 123.55,78.25 123.55,77.25 ccw(c123.65,77.25) 123.65,77.15 cw(c123.65,77.25) 123.55,77.25 ccw(c123.95,77.25) 123.95,76.85

## Silkscreen, mask and mechanical layers (free items; w line width, h text height)
Top Overlay:
  text "BUTTON" at 150.743,64.276 h0.7
  text "RESET" at 157.485,64.276 h0.7
Bottom Overlay:
  lines w0.254: 122.15,63.75 122.15,71.6 132.25,71.6 132.25,63.75 122.15,63.75 ; 131.4,91.25 144.6,91.25 144.6,94.25 131.4,94.25 131.4,91.25
  text "GND" at 139.484,87.23 h0.7 r270
  text "SWO" at 137.246,87.177 h0.7 r270
  text "SWDIO" at 132.246,86.047 h0.7 r270
  text "SWDCLK" at 134.746,85.464 h0.7 r270
  text "+3.3V" at 141.984,85.368 h0.7 r270
  text "+48V" at 125.88,70.43 h0.7
  text "GND" at 130.88,70.43 h0.7
  text "INPUT" at 128.824,64.4 h0.7